# EAGLE board Sensorenschakeling_PCB_v2 (EAGLE 9.7.0)
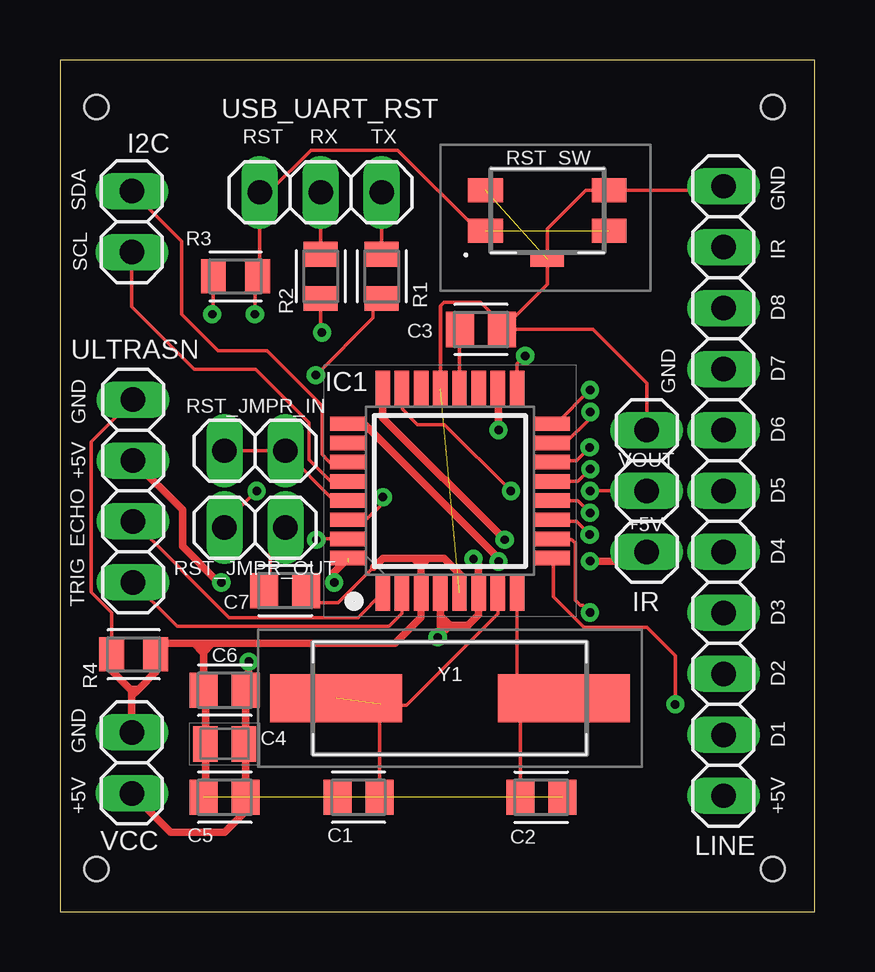
[diagram p0: board, top side]
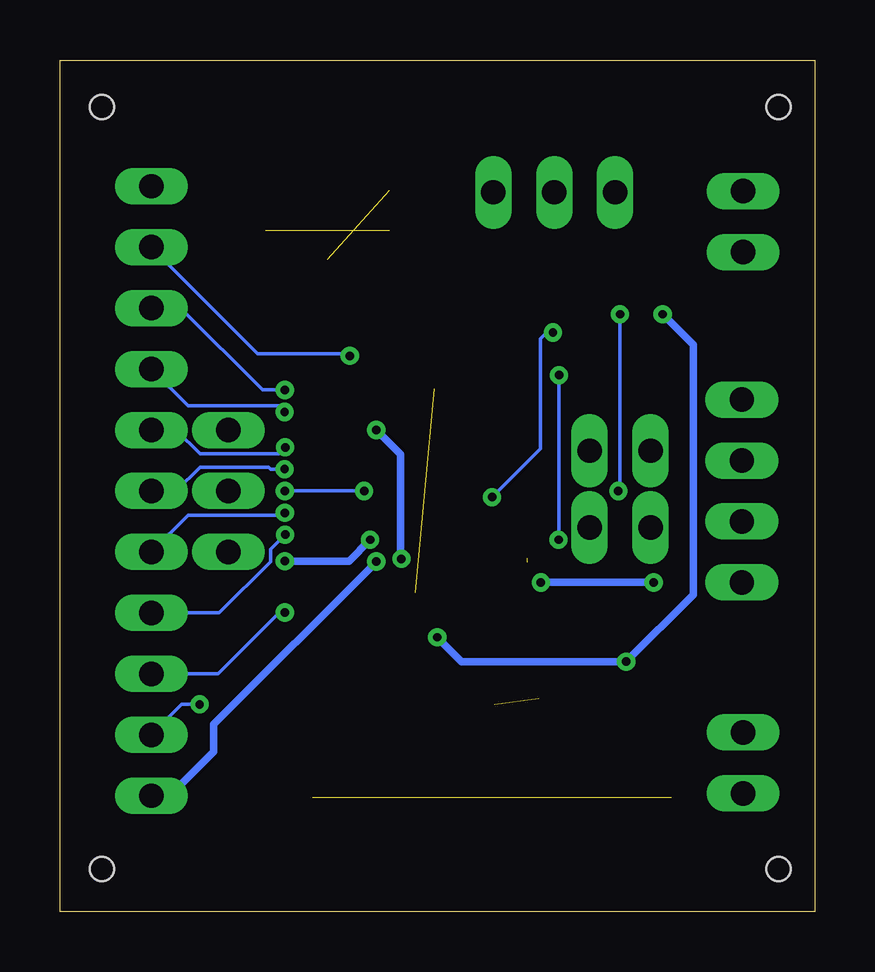
[diagram p1: board, bottom side, seen from below]

Size 31.48 x 35.48 mm. Coordinates in mm from the lower left corner, seen from the top.
Outline: 0,0 31.48,0 31.48,35.48 0,35.48 0,0
Copper layers (1*16): Top 0.035mm / dielectric 1.5mm / Bottom 0.035mm
Design rules "default": minimum track width 6mil, minimum drill 0.35mm, track to track 6mil, track to pad 6mil, pad to pad 6mil, via to via 6mil, smd to smd 6mil, copper to edge 40mil, drill to drill 6mil, minimum pad ring 10mil, minimum via ring 8mil, stop-mask expansion 4mil, vias tented up to drill 0mil, thermal gap 10mil
Holes 1 mm at 29.72,33.53 29.72,1.78 1.52,33.53 1.52,1.78

## Footprints (pad centres in the part's own frame; a part is rotated, then mirrored left to right if it is on the bottom)
CAPC2012X110 = smd 1.165 x 1.465: 1 -0.875,0; 2 0.875,0
CAPC2012X145N = smd 1.02 x 1.47: 1 -0.8,0; 2 0.8,0
1X02 = drill 1.016 long: 1 -1.27,0; 2 1.27,0
QFP80P900X900X120-32N = smd 1.5 x 0.6: 1 -4.25,2.8; 2 -4.25,2; 3 -4.25,1.2; 4 -4.25,0.4; 5 -4.25,-0.4; 6 -4.25,-1.2; 7 -4.25,-2; 8 -4.25,-2.8; 17 4.25,-2.8; 18 4.25,-2; 19 4.25,-1.2; 20 4.25,-0.4; 21 4.25,0.4; 22 4.25,1.2; 23 4.25,2; 24 4.25,2.8 | smd 0.6 x 1.5: 9 -2.8,-4.25; 10 -2,-4.25; 11 -1.2,-4.25; 12 -0.4,-4.25; 13 0.4,-4.25; 14 1.2,-4.25; 15 2,-4.25; 16 2.8,-4.25; 25 2.8,4.25; 26 2,4.25; 27 1.2,4.25; 28 0.4,4.25; 29 -0.4,4.25; 30 -1.2,4.25; 31 -2,4.25; 32 -2.8,4.25
1X03 = drill 1.016 long: 1 -2.54,0; 2 0,0; 3 2.54,0
1X11 = drill 1.016 long: 1 -12.7,0; 2 -10.16,0; 3 -7.62,0; 4 -5.08,0; 5 -2.54,0; 6 0,0; 7 2.54,0; 8 5.08,0; 9 7.62,0; 10 10.16,0; 11 12.7,0
RESC2012X65 = smd 1.031 x 1.42: 1 -0.919,0; 2 0.919,0
EVQP2V02W = smd 1 x 1.45: 1 -0.85,2.575; 2 0.85,2.575; 3 -0.85,-2.575; 4 0.85,-2.575 | smd 0.65 x 1.4: 5 -2.025,0
1X04 = drill 1.016 long: 1 -3.81,0; 2 -1.27,0; 3 1.27,0; 4 3.81,0
HC49SM830506016ATF = smd 5.5 x 2: 1 -4.75,0; 2 4.75,0

## Placement (x,y rotation side)
C1  22pF  [CAPC2012X110]  12.45,4.76 0 top
C2  22pF  [CAPC2012X110]  20.07,4.76 180 top
C3  100nF  [CAPC2012X110]  17.55,24.26 0 top
C4  4.7uF_16V  [CAPC2012X145N]  6.87,6.99 0 top
C5  1uF  [CAPC2012X110]  6.87,4.76 0 top
C6  1uF  [CAPC2012X110]  6.87,9.22 0 top
C7  10uF  [CAPC2012X110]  9.39,13.38 180 top
I2C  [1X02]  3,28.75 270 top
IC1  ATMEGA328P-AN  [QFP80P900X900X120-32N]  16.26,17.53 90 top
IR  PINHD-1X3  [1X03]  24.46,17.53 90 top
LINE  PINHD-1X11  [1X11]  27.66,17.53 270 top
R1  1kΩ  [RESC2012X65]  13.41,26.47 90 top
R2  1kΩ  [RESC2012X65]  10.87,26.47 90 top
R3  1kΩ  [RESC2012X65]  7.32,26.47 180 top
R4  1kΩ  [RESC2012X65]  3.07,10.72 0 top
RST_JMPR_IN  [1X02]  8.13,19.2 0 top
RST_JMPR_OUT  [1X02]  8.13,16 0 top
RST_SW  EVQ-P2F02K  [EVQP2V02W]  20.32,29.21 90 top
ULTRASN  PINHD-1X4  [1X04]  3.05,17.53 90 top
USB_UART_RST  [1X03]  10.87,29.97 0 top
VCC  [1X02]  3,6.2 90 top
Y1  16MHz  [HC49SM830506016ATF]  16.26,8.89 180 top

## Library data of the parts
C1-C3 C5-C7 = Capacitor; CATEGORY: Capacitor
C4 = CC0805ZKY5V7BB475; ARROW_PART_NUMBER: CC0805ZKY5V7BB475; ARROW_PRICE-STOCK: https://www.arrow.com/en/products/cc0805zky5v7bb475/yageo; DESCRIPTION: YAGEO - CC0805ZKY5V7BB475 - SMD Multilayer Ceramic Capacitor, 4.7 F, 16 V, 0805 [2012 Metric], +80%, -20%, Y5V, CC Series; HEIGHT: 1.45mm; MANUFACTURER_NAME: KEMET; MANUFACTURER_PART_NUMBER: CC0805ZKY5V7BB475; MOUSER_PART_NUMBER: 603-CC805ZKY5V7BB475; MOUSER_PRICE-STOCK: https://www.mouser.co.uk/ProductDetail/Yageo/CC0805ZKY5V7BB475?qs=7s%252B3O6pAiyA4wtTM471wUA%3D%3D
I2C RST_JMPR_IN RST_JMPR_OUT USB_UART_RST VCC = pinhead
IC1 = ATMEGA328P-AN; ARROW_PART_NUMBER: ATMEGA328P-AN; ARROW_PRICE-STOCK: https://www.arrow.com/en/products/atmega328p-an/microchip-technology?region=nac; DESCRIPTION: MCU 8-bit ATmega AVR RISC 32KB Flash Atmel ATMEGA328P-AN, 8bit AVR Microcontroller, 20MHz, 32 kB Flash, 32-Pin TQFP; HEIGHT: 1.2mm; MANUFACTURER_NAME: Microchip; MANUFACTURER_PART_NUMBER: ATMEGA328P-AN; MOUSER_PART_NUMBER: 556-ATMEGA328P-AN; MOUSER_PRICE-STOCK: https://www.mouser.co.uk/ProductDetail/Microchip-Technology-Atmel/ATMEGA328P-AN?qs=6Dg1WZIWLC6WK556tw8xAw%3D%3D
IR LINE ULTRASN = Connector; CATEGORY: CONNECTOR; SUB-CATEGORY: PIN-HEADER
R1-R4 = Resistor; CATEGORY: Resistor; SUB-CATEGORY: Fixed
RST_SW = EVQ-P2F02K; DESCRIPTION: Tactile Switches Light Touch Switch 4.7x3.5mm SMD midd; HEIGHT: 2.5mm; MANUFACTURER_NAME: Panasonic; MANUFACTURER_PART_NUMBER: EVQ-P2F02K; MOUSER_PART_NUMBER: 667-EVQ-P2F02K; MOUSER_PRICE-STOCK: https://www.mouser.co.uk/ProductDetail/Panasonic/EVQ-P2F02K?qs=WwqriLBepZsV0QucKJ89rg%3D%3D
Y1 = HC49SM-8-30-50-60-16-ATF; DESCRIPTION: MULTICOMP - HC49SM-8-30-50-60-16-ATF - CRYSTAL, 8MHZ, 16PF, SMD; HEIGHT: 4mm; MANUFACTURER_NAME: MULTICOMP; MANUFACTURER_PART_NUMBER: HC49SM-8-30-50-60-16-ATF

## Nets
AREF: C3.1 IC1.20
D1: IC1.9 LINE.10
D2: IC1.10 LINE.9
D3: IC1.11 LINE.8
D4: IC1.12 LINE.7
D5: IC1.13 LINE.6
D6: IC1.14 LINE.5
D7: IC1.15 LINE.4
D8: IC1.16 LINE.3
ECHO: IC1.1 ULTRASN.2
GND: C1.1 C2.1 C3.2 C4.1 C5.1 C6.1 C7.1 IC1.3 IC1.5 IC1.21 IR.3 LINE.1 R4.1 R4.2 RST_SW.2 RST_SW.4 RST_SW.5 ULTRASN.4 VCC.2
IR: IC1.17 LINE.2
IR_ON/OFF: IC1.24 IR.1
LINE_ON/OFF: IC1.25 LINE.11
N$1: IC1.31 R1.1
N$2: IC1.30 R2.1
RST: IC1.29 RST_JMPR_IN.1 RST_JMPR_IN.2
RST_C: C7.2 RST_JMPR_OUT.2
RST_USB: R3.1 RST_JMPR_OUT.1 RST_SW.1 RST_SW.3 USB_UART_RST.1
RX: R2.2 USB_UART_RST.2
SCL: I2C.2 IC1.28
SDA: I2C.1 IC1.27
TOSC1: C1.2 IC1.7 Y1.2
TOSC2: C2.2 IC1.8 Y1.1
TRIG: IC1.2 ULTRASN.1
TX: R1.2 USB_UART_RST.3
ULTRASN_ON/OFF: IC1.32 ULTRASN.3
VCC: C4.2 C5.2 C6.2 IC1.4 IC1.6 IC1.18 R3.2 VCC.1
VOUT: IC1.23 IR.2

## Tracks (layer width: path | path; a pad name or v marks a point on that pad's centre or on a via)
AREF
  Top 0.152: C3.1 16.66,24.24 IC1.20
D1  (via drill 0.35 pad 0.55)
  Top 0.152: IC1.9 20.57,14.66 20.57,13.13 21.85,11.85 24.47,11.85 25.65,10.67 v25.65,8.64
  Bottom 0.152: v25.65,8.64 26.39,8.64 LINE.10
D2  (via drill 0.35 pad 0.55)
  Top 0.152: IC1.10 20.54,15.49 21.34,15.49 21.48,15.35 21.48,12.98 21.7,12.76 21.8,12.76 v22.1,12.46
  Bottom 0.152: LINE.9 24.89,9.91 22.34,12.46 v22.1,12.46
D3  (via drill 0.35 pad 0.55)
  Top 0.152: IC1.11 20.58,16.26 21.54,16.26 v22.09,15.71
  Bottom 0.152: LINE.8 24.84,12.45 22.7,14.58 22.7,15.09 v22.09,15.71
D4  (via drill 0.35 pad 0.55)
  Top 0.152: IC1.12 21.59,17.13 v22.1,16.62
  Bottom 0.152: LINE.7 26.14,16.51 22.35,16.51 22.25,16.62 v22.1,16.62
D5  (via drill 0.35 pad 0.55)
  Top 0.152: IC1.13 21.6,17.93 v22.11,18.43
  Bottom 0.152: v22.11,18.43 22.7,18.43 22.78,18.52 25.63,18.52 26.62,17.53 LINE.6
D6  (via drill 0.35 pad 0.55)
  Top 0.152: IC1.14 20.58,18.8 21.54,18.8 v22.09,19.34
  Bottom 0.152: v22.09,19.34 22.35,19.07 25.63,19.07 26.62,20.07 LINE.5
D7  (via drill 0.35 pad 0.55)
  Top 0.152: v22.11,20.82 22.11,20.56 21.08,19.53 IC1.15
  Bottom 0.152: LINE.4 26.14,21.08 22.35,21.08 22.35,21.06 v22.11,20.82
D8  (via drill 0.35 pad 0.55)
  Top 0.152: IC1.16 20.69,20.33 v22.1,21.74
  Bottom 0.152: v22.1,21.74 23.03,21.74 26.44,25.15 LINE.3
ECHO
  Top 0.152: IC1.1 12.42,12.24 7.06,12.24 ULTRASN.2
GND  (4 unrouted)
  Top 0.152: C7.1 10.78,12.87 11.6,12.87 13.08,14.35 | 16.76,13.97 16.76,13.38 IC1.5 | LINE.1 27.5,30.06 RST_SW.4 21.93,30.06 20.32,28.45 RST_SW.5 20.32,26.15 18.55,24.38 | 18.55,24.38 C3.2 22.23,24.26 24.46,22.02 IR.3 | IC1.21 15.86,25.25 16,25.4 17.53,25.4 18.55,24.38 | R4.1 2.15,12.45 1.29,13.31 1.29,19.58 ULTRASN.4
  Top 0.305: 3.99,9.99 3.28,9.27 | 3.28,9.27 3,8.99 | VCC.2 3,8.99 | 15.06,14.41 IC1.3 15.06,12.26 13.97,11.18 6.35,11.18 | 15.06,14.41 15.24,14.59 15.24,14.73 | 15.24,14.73 16,14.73 16.76,13.97 | 15.24,14.73 14.73,14.73 | 14.73,14.73 13.46,14.73 13.08,14.35 | 15.06,14.41 14.73,14.73 | 6.35,11.18 6.1,11.18 | 6.1,11.18 5.59,11.18 | 5.59,11.18 4.45,11.18 R4.2 3.99,9.99 | 3.99,9.99 3.99,9.98 | 2.21,10.67 R4.1 2.15,10.04 2.92,9.27 | 5.99,10.77 C6.1 6.07,9.14 C4.1 6.07,4.84 C5.1 | 5.99,10.77 5.99,11.07 6.1,11.18 | 5.99,10.77 5.97,10.79 | 5.97,10.79 5.59,11.18 | 5.97,10.79 6.35,11.18 | 3,8.99 3,9.2 2.92,9.27 | 2.92,9.27 3.28,9.27
IR  (via drill 0.35 pad 0.55)
  Top 0.152: IC1.17 19.06,22.82 v19.39,23.16
  Bottom 0.152: LINE.2 23.23,23.25 19.48,23.25 v19.39,23.16
IR_ON/OFF  (via drill 0.35 pad 0.55)
  Top 0.305: v22.1,14.6 24.08,14.6 IR.1 | IC1.24 13.46,20.58 v18.54,15.49
  Bottom 0.305: v18.54,15.49 19.43,14.61 v22.09,14.61 v22.1,14.6
LINE_ON/OFF  (via drill 0.35 pad 0.55)
  Top 0.152: 18.29,14.62 v18.29,14.59
  Top 0.305: 18.29,14.62 18.29,14.72 12.69,20.33 IC1.25
  Bottom 0.305: LINE.11 26.9,4.83 25.07,6.66 25.07,7.8 v18.29,14.59
N$1  (via drill 0.35 pad 0.55)
  Top 0.152: v10.69,15.49 10.72,15.53 IC1.31 | v10.67,22.35 13.06,24.74 13.06,25.2 R1.1
  Bottom 0.152: v10.67,22.35 10.67,15.52 v10.69,15.49
N$2  (via drill 0.35, 0.35 pad 0.55)
  Top 0.152: v13.46,17.27 13.46,17.02 12.77,16.33 IC1.30 | v10.92,24.13 10.87,24.18 R2.1
  Bottom 0.152: v13.46,17.27 11.44,19.3 11.44,23.87 11.18,24.13 v10.92,24.13
RST
  Top 0.152: RST_JMPR_IN.1 RST_JMPR_IN.2 9.4,19.16 11.43,17.13 IC1.29
RST_C
  Top 0.152: C7.2 8.77,13.63 8.77,15.37 RST_JMPR_OUT.2
RST_USB  (via drill 0.35 pad 0.55)  (1 unrouted)
  Top 0.152: v8.13,24.89 8.13,26.47 R3.1 8.33,26.56 USB_UART_RST.1 8.71,29.97 10.46,31.73 14.08,31.73 17.44,28.36 RST_SW.1 | v8.2,17.53 6.86,16.18 RST_JMPR_OUT.1
  Bottom 0.152: v8.2,17.53 8.13,17.6 v8.13,24.89
RX
  Top 0.152: R2.2 USB_UART_RST.2
SCL
  Top 0.152: IC1.28 11.28,17.93 10.39,18.82 10.39,20.38 8.16,22.61 5.59,22.61 3,25.2 I2C.2
SDA
  Top 0.152: IC1.27 11.25,18.73 10.92,19.05 10.92,21.08 8.64,23.37 6.6,23.37 5.08,24.89 5.08,27.94 I2C.1
TOSC1  (1 unrouted)
  Top 0.152: C1.2 13.32,8.6 | 13.32,8.6 13.36,8.64 | IC1.7 18.26,12.41 14.44,8.6 13.32,8.6
TOSC2
  Top 0.152: 19.84,8.66 19.3,8.66 19.19,8.55 19.19,8.38 | 19.84,8.66 19.86,8.64 | Y1.1 20.78,8.66 19.84,8.66 | C2.2 19.19,8.38 | IC1.8 19.06,8.52 19.19,8.38
TRIG
  Top 0.152: ULTRASN.1 4.88,11.89 13.72,11.89 14.26,12.42 IC1.2
TX
  Top 0.152: R1.2 USB_UART_RST.3
ULTRASN_ON/OFF  (via drill 0.35, 0.35 pad 0.55)  (1 unrouted)
  Top 0.152: 11.94,14.49 12.01,14.56
  Top 0.305: ULTRASN.3 5.11,16.74 5.11,15.21 6.6,13.72 v6.73,13.72 | v11.43,13.72 11.43,14.15 IC1.32
  Bottom 0.305: v6.73,13.72 v11.43,13.72
VCC  (via drill 0.35)
  Top 0.152: R3.2 6.4,24.94 v6.35,24.89
  Top 0.305: IC1.4 15.86,12.34 | 15.86,12.34 16.13,12.06 | 16.13,12.06 16.26,11.94 | 16.26,11.94 17.02,11.94 17.46,12.38 IC1.6 17.46,14.48 v17.24,14.7 | 16.26,11.94 v15.75,11.43 15.86,11.54 15.86,11.94 | 15.86,12.34 15.86,11.94 | 15.86,11.94 16,11.94 16.13,12.06 | v18.29,20.07 18.29,21.74 IC1.18 | 7.75,6.91 C5.2 7.75,4.19 6.86,3.3 4.62,3.3 VCC.1 | 7.75,6.91 C4.2 | 7.75,6.91 C6.2 7.87,9.35 v7.87,10.41
  Bottom 0.305: v18.29,20.07 17.27,19.05 17.27,14.73 v17.24,14.7 | v6.35,24.89 5.08,23.62 5.08,13.21 v7.87,10.41 14.73,10.41 v15.75,11.43
VOUT  (via drill 0.35 pad 0.55)
  Top 0.152: IR.2 v22.1,17.53 | IC1.23 14.27,21.76 14.27,20.93 14.91,20.29 16.03,20.29 v18.8,17.53
  Bottom 0.152: v22.1,17.53 v18.8,17.53

## Text on the board
tNames: RST | RX | TX | SDA | GND | SCL | IR | D8 | GND | D7 | GND | D6 | VOUT | +5V | D5 | +5V | ECHO | D4 | TRIG | D3 | D2 | GND | D1 | +5V | +5V